# Altium PCB caton.PcbDoc (part 2 of 2)
Units mm, origin at the board's own origin, x right, y up, seen from the top; angles counter-clockwise.
Board outline 47.5 x 40.5 mm, 6 copper layers (Signal Layer 1, Signal Layer 2, Signal Layer 3, Signal Layer 4, Signal Layer 5, Signal Layer 6), stack 1.539 mm thick; 76 components, 74 nets, 365 pads, 138 vias.
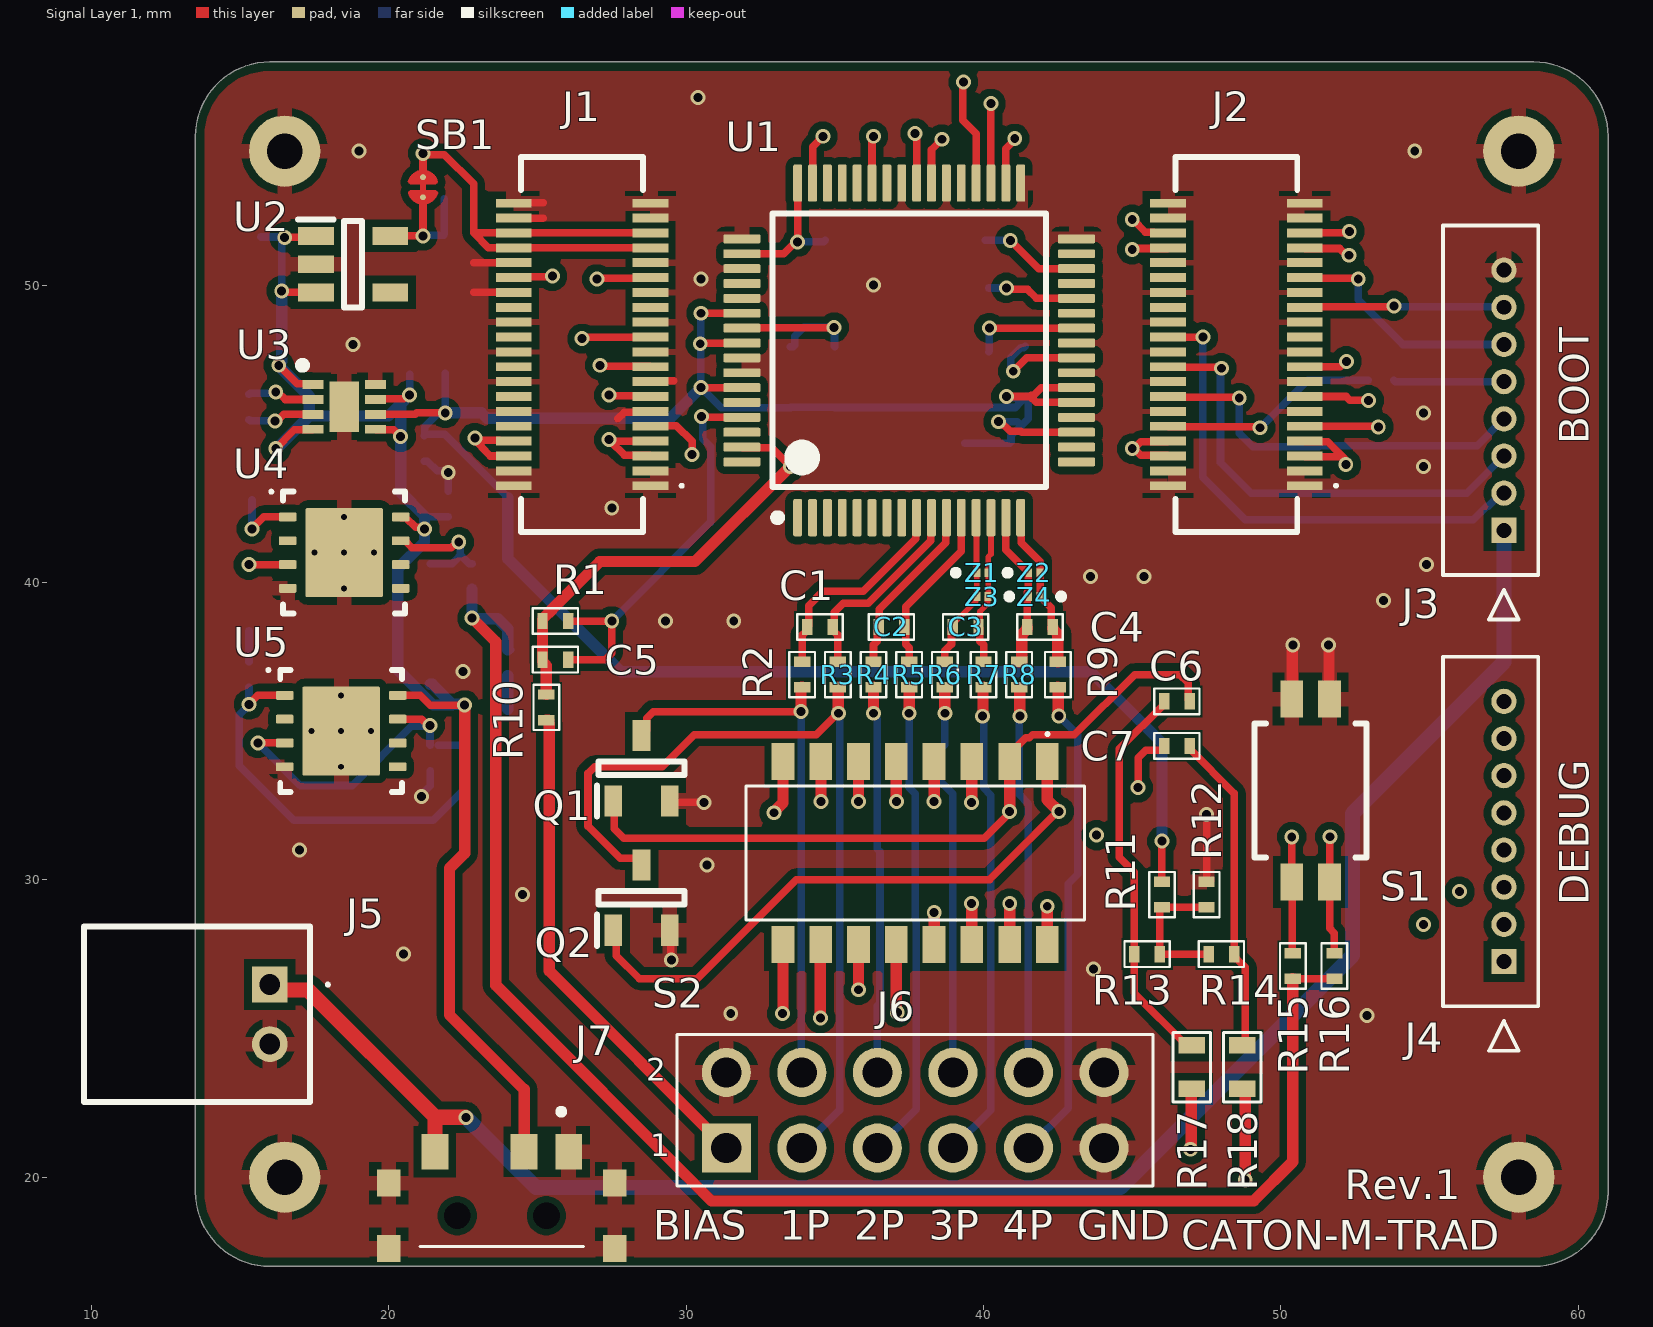
[diagram p0: Signal Layer 1 view]

## Polygon pours and split planes (outlines as drawn) (continued)
+1.8V_SCUM on Signal Layer 5 "SL5_1V8" (solid, remove dead copper, pour order 6): 11,58.7 11,17.24 ccw(c13.54,17.24) 13.54,14.7 61.46,14.7 ccw(c61.46,17.24) 64,17.24 64,57.16 ccw(c61.46,57.16) 61.46,59.7 14,59.7
GND on Signal Layer 4 "SL4_GND" (solid, remove dead copper, pour order 7): 11.2,58.8 11.2,17.34 ccw(c13.74,17.34) 13.74,14.8 61.66,14.8 ccw(c61.66,17.34) 64.2,17.34 64.2,57.26 ccw(c61.66,57.26) 61.66,59.8 14.2,59.8
GND on Signal Layer 6 "SL6_GND" (solid, remove dead copper, pour order 5): 10.8,58.4 10.8,16.94 ccw(c13.34,16.94) 13.34,14.4 61.26,14.4 ccw(c61.26,16.94) 63.8,16.94 63.8,56.86 ccw(c61.26,56.86) 61.26,59.4 13.8,59.4
GND on Signal Layer 1 "SL1_GND" (solid, remove dead copper, pour order 4): 10.9,58.7 10.9,17.24 ccw(c13.44,17.24) 13.44,14.7 61.36,14.7 ccw(c61.36,17.24) 63.9,17.24 63.9,57.16 ccw(c61.36,57.16) 61.36,59.7 13.9,59.7

## Silkscreen, mask and mechanical layers (free items; w line width, h text height)
Top Overlay:
  text "BOOT" at 60.35,44.65 h1 r90
  text "DEBUG" at 60.35,29.15 h1 r90
  text "Rev.1" at 52.15,19.25 h1
  text "BIAS" at 28.9,17.9 h1
  text "1P" at 33.15,17.9 h1
  text "2P" at 35.65,17.9 h1
  text "3P" at 38.15,17.9 h1
  text "4P" at 40.65,17.9 h1
  text "GND" at 43.15,17.9 h1
  text "CATON-M-TRAD" at 46.65,17.55 h1
Mechanical 7:
  the board outline again, w0.254

## Text inside footprints (layer, text, board x,y; h text height)
J6: Top Overlay "2" at 28.658,23.24 h0.76; Top Overlay "1" at 28.785,20.7 h0.76